# Altium PCB Antenna_v1.PcbDoc
Units mm, origin at the board's own origin, x right, y up, seen from the top; angles counter-clockwise.
Board outline 94.61 x 94.49 mm, 2 copper layers (Top Layer, Bottom Layer); 8 components, 6 nets, 29 pads, 10 vias.
Unrouted connection lines stored in the file: 5.
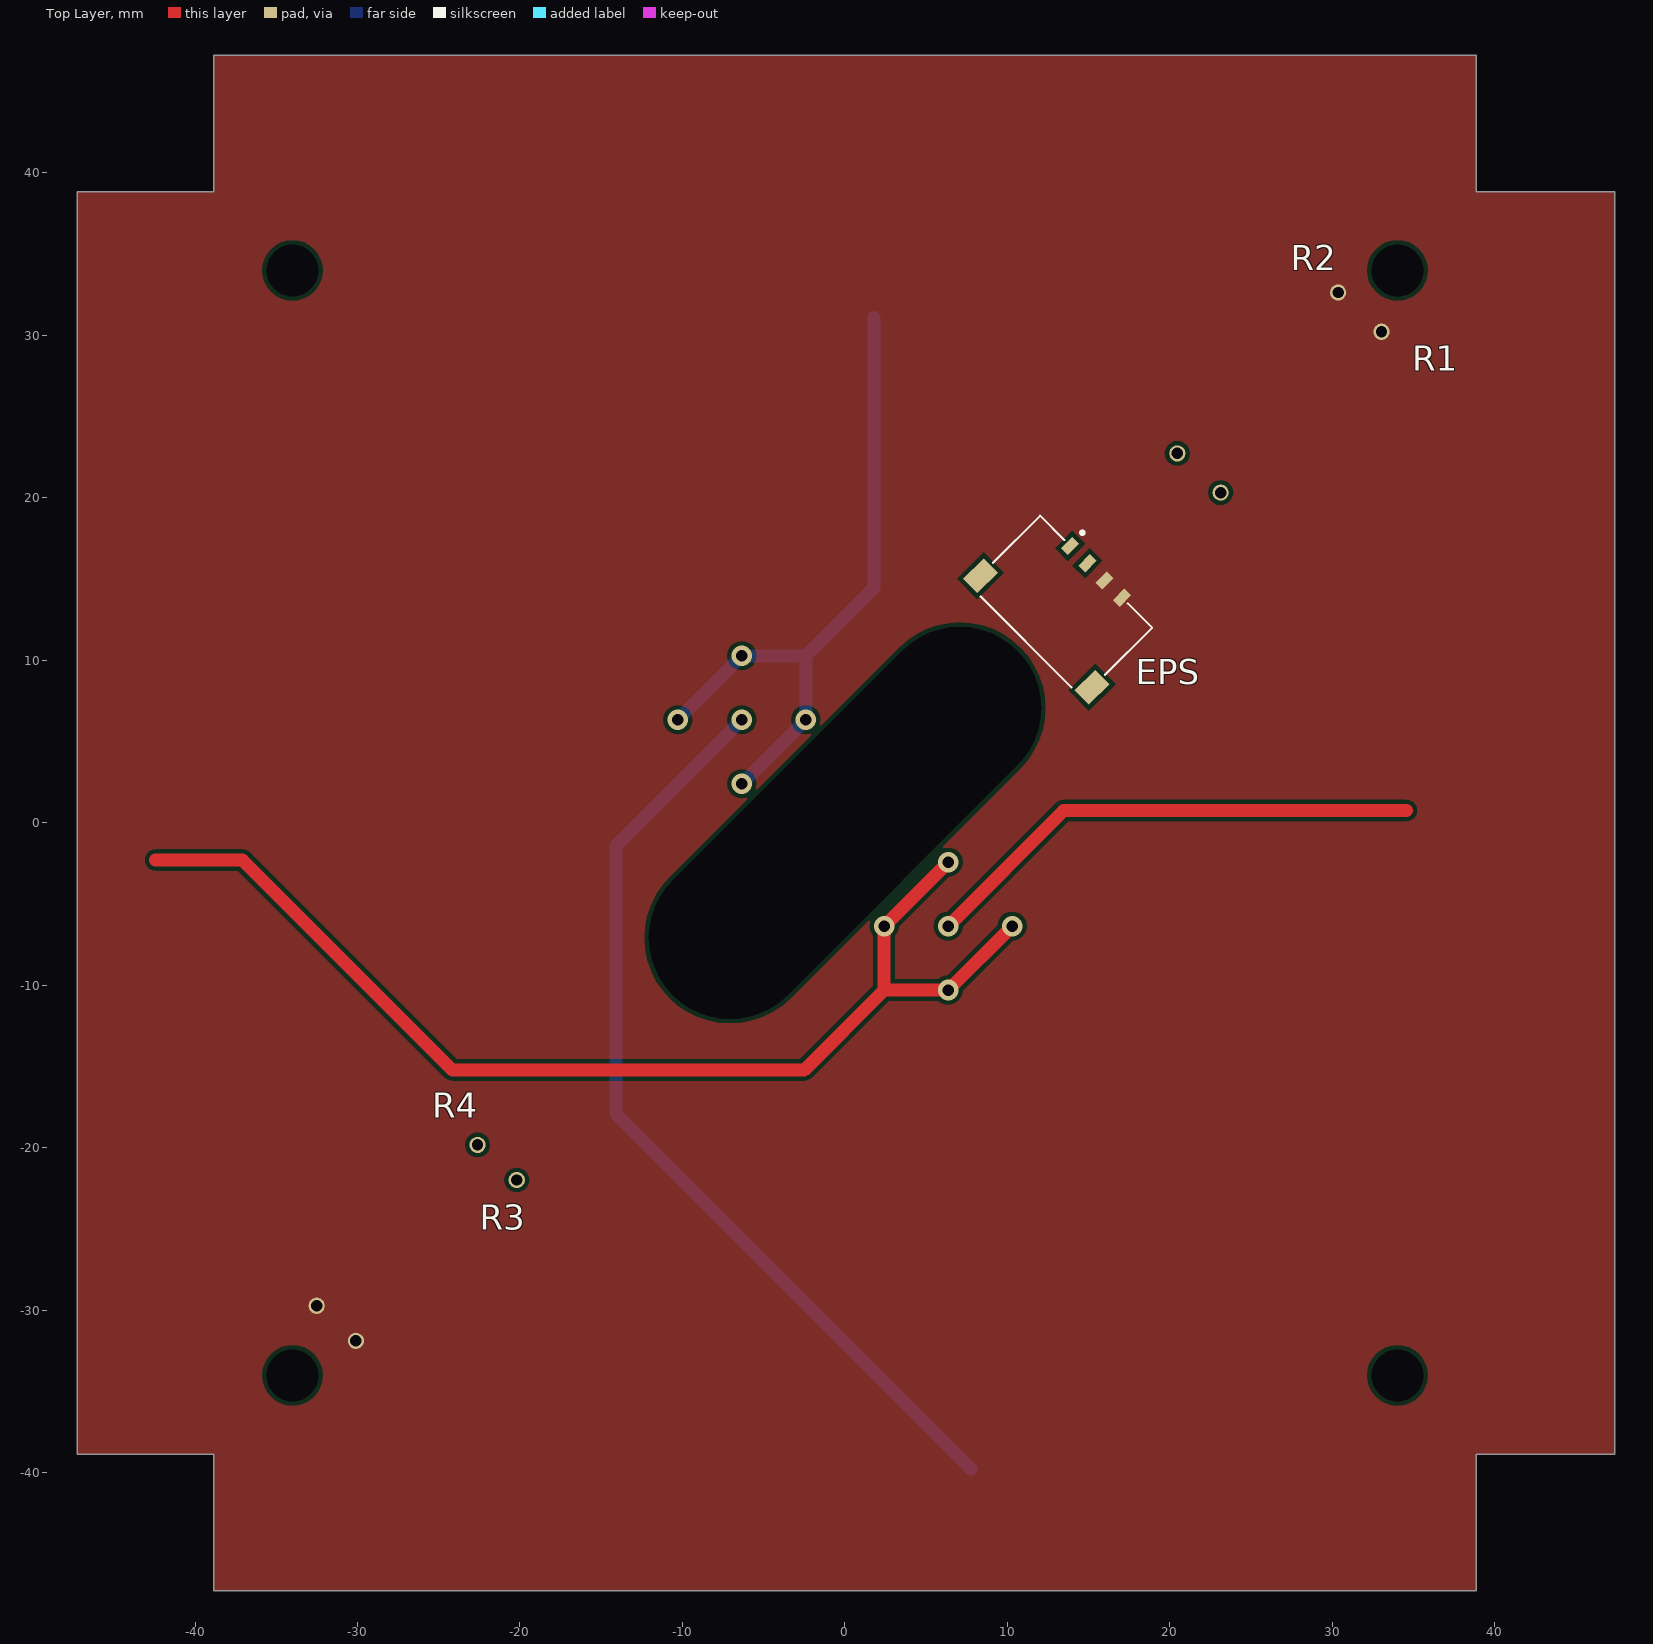
[diagram p0: Top Layer view]
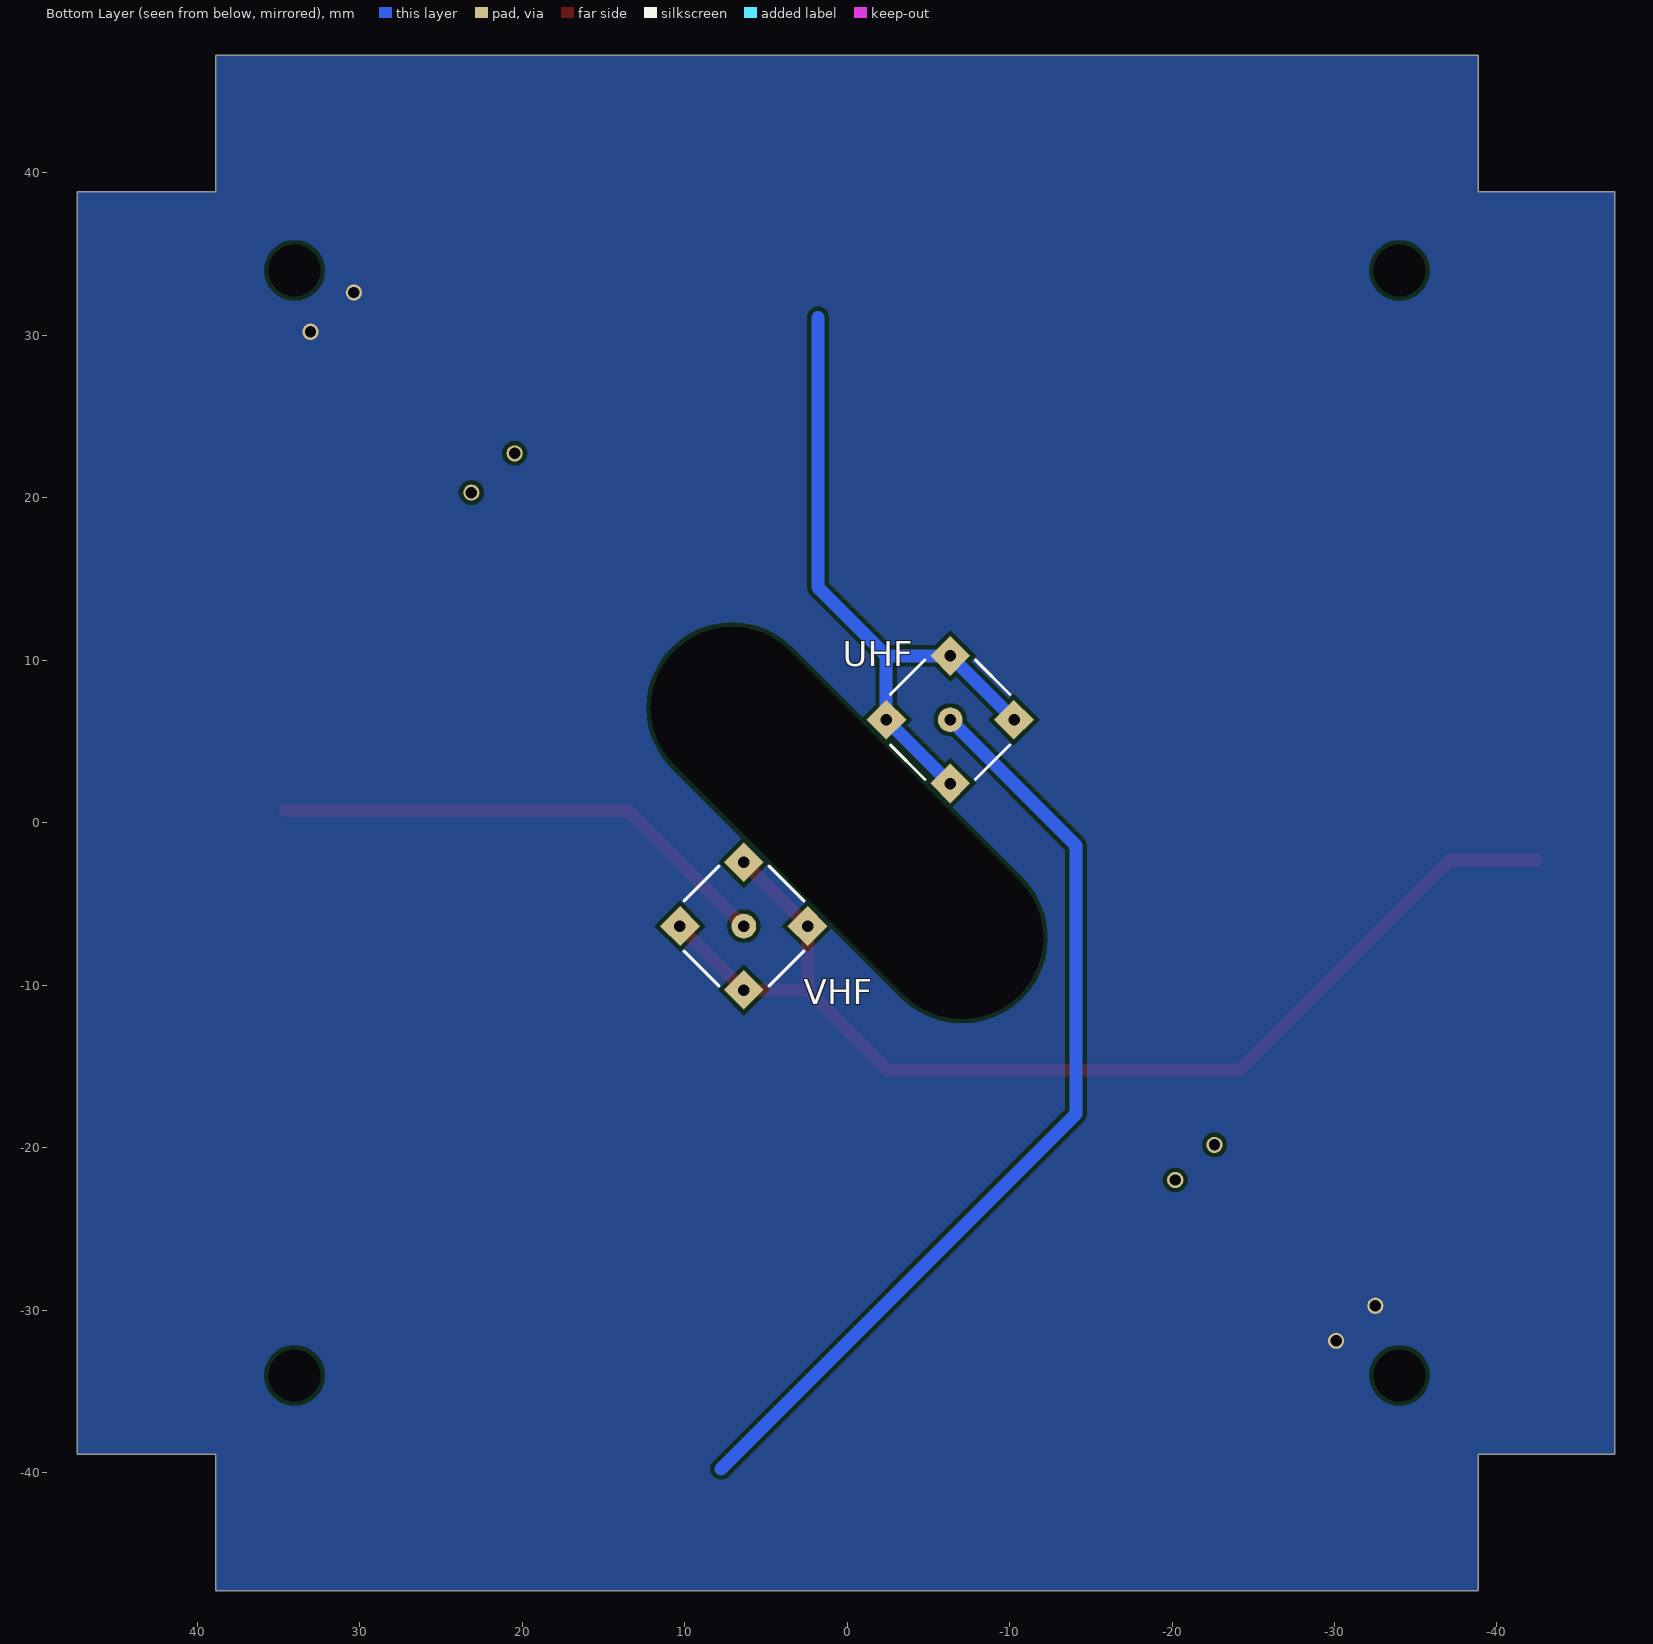
[diagram p1: Bottom Layer view, seen from below]

## Layer stack, top to bottom
Top Solder: solder mask 0.0102, Solder Resist, Dk 3.5
Top Layer: signal copper 0.0356
Dielectric 1: dielectric 0.32, FR-4, Dk 4.8
Bottom Layer: signal copper 0.0356
Bottom Solder: solder mask 0.0102, Solder Resist, Dk 3.5

## Board outline
38.862,47.24 38.862,38.858 47.371,38.858 47.371,-38.866 38.862,-38.866 38.862,-47.248 -38.862,-47.248 -38.862,-38.866 -47.244,-38.866 -47.244,38.858 -38.862,38.858 -38.862,47.24

## Design rules (kind name [scope] priority, off if disabled: settings)
Clearance [All] p1: gap=0.254 ignorepadtopadclearanceinfootprint=FALSE except(0: Arc-Hole Track-Hole SMDPad-Hole THPad-Hole Via-Hole Fill-Hole Poly-Hole Region-Hole Text-Hole)
ComponentClearance [All] p1 off: gap=0.254 collisioncheckmode=3 verticalgap=0.254 showdistances=FALSE
PolygonConnect [All] p1: connectstyle=Direct reliefconductorwidth=0.254 reliefentries=4 polygonreliefangle="90 Angle" airgapwidth=0.254
RoutingVias [All] p1: holewidth=0.711 width=1.27 viastyle="Through Hole" minholewidth=0.711 minwidth=1.27 maxholewidth=0.711 maxwidth=1.27
SolderMaskExpansion [All] p1: expansion=0.102
Width [All] p1: maxlimit=1 minlimit=0.254 preferedwidth=0.254 minimp=50.000000 maximp=50.000000 favimp=50.000000
29 further rules are at their usual default settings.

## Components (designator, comment, footprint, x,y, rotation, side; value= is the part's Value field where it differs from the comment)
EPS "Comment" *MOLEX_5040500491_5040500491(Primary) 13.3,13.3 r315 top
R1 "Comment" "RESITORS 10OHM" 23.121,20.327 r45 top
R2 "Comment" "RESITORS 10OHM" 20.454,22.74 r45 top
R3 "Comment" "RESITORS 10OHM" -30.099,-31.877 r45 top
R4 "Comment" "RESITORS 10OHM" -32.512,-29.718 r45 top
UHF "Comment" CON-SMA-SMD-RA -6.35,6.35 r135 bottom
VHF "Comment" CON-SMA-SMD-RA 6.35,-6.35 r45 bottom
? "Comment" 10OHMRES 1.905,2.028 r0 top

## Footprints (in the part's own frame and the unit in brackets; to place one, negate y for a bottom-side part, rotate by r counter-clockwise, add the part's x,y. Pads: shape width x height; smd on the part's side, far side on the other; paste and mask are expansions set on the pad)
10OHMRES [mm]
*MOLEX_5040500491_5040500491(Primary) [mm]
  rect 0.6x1 smd: 1(-2.25,3.04) 2(-0.75,3.04) 3(0.75,3.04) 4(2.25,3.04)
  rect 1.25x1.8 smd: SH1(4.855,-2.15) SH2(-4.855,-2.15)
  silkscreen extent -4.88,-3.05 4.88,4.25, body extent -5.28,-3.1 5.27,3.34, height 1.98
CON-SMA-SMD-RA [mil] "Connector, SMA Female, 5-Lead, SM, Right-Angle, Body 7x7mm"
  round 60 smd: 1(0,0)
  rect 68.5x68.5 smd: 2(-109.25,109.25) 3(109.25,109.25) 4(109.25,-109.25) 5(-109.25,-109.25)
  silkscreen extent -146,-146 146,146
"RESITORS 10OHM" [mm]
  round 1 hole 0.7: 5(0,0) 6(14,0)

## Free pads (board coordinates)
  round 1.524 hole 10 slot 30 at 45 deg: 4(0,0)
  round 3 hole 3.2: 5(34,34) 6(-34,34) 7(-34,-34) 8(34,-34)

## Via types
v1: diameter 1.27, hole 0.711, Top Layer to Bottom Layer, 10 vias

## Nets (pads, with @x,y where several pads share a name; then routed paths per layer and width w, separated by ;. In a path a pad name is that pad's centre, name@x,y a point inside that pad or via, vN(x,y) a via of type N, cw(c..) or ccw(c..) an arc to the next point about the centre after c; other vN are vias at no path point)
5V_DEP: EPS.1 EPS.2 R1.5 R2.5 R3.6 R4.6
GND: EPS.3 EPS.4 R1.6 R2.6 R3.5 R4.5
UHF_HIGH: UHF.1 | length 58.4
  Bottom Layer w0.8: v1(-6.35,6.35) -14.097,-1.397 -14.097,-17.907 7.747,-39.751
UHF_LOW: UHF.2 UHF.3 UHF.4 UHF.5 | length 41.6
  Bottom Layer w0.8: v1(-10.287,6.35) v1(-6.35,10.287) -2.413,10.287 ; v1(-6.35,2.413) v1(-2.413,6.35) -2.413,10.287 ; 1.778,31.115 1.778,14.478 -2.413,10.287
VHF_HIGH: VHF.1 | length 31.1
  Top Layer w0.8: v1(6.35,-6.35) 13.462,0.762 34.544,0.762
VHF_LOW: VHF.2 VHF.3 VHF.4 VHF.5 | length 71.2
  Top Layer w0.8: -42.418,-2.286 -37.084,-2.286 -24.155,-15.215 -2.515,-15.215 2.413,-10.287 ; v1(6.35,-2.413) v1(2.413,-6.35) 2.413,-10.287 ; v1(10.287,-6.35) v1(6.35,-10.287) 2.413,-10.287
pads on no net: EPS.SH1 EPS.SH2

## Polygon pours and split planes (outlines as drawn)
GND on Top Layer "GND_L01_P000" (solid, pour order 0): 38.862,47.24 38.862,38.858 47.371,38.858 47.371,-38.866 38.862,-38.866 38.862,-47.248 -38.862,-47.248 -38.862,-38.866 -47.244,-38.866 -47.244,38.858 -38.862,38.858 -38.862,47.24
GND on Bottom Layer "Top Layer-No Net" (solid, pour order 1): 38.862,47.24 38.862,38.858 47.371,38.858 47.371,-38.866 38.862,-38.866 38.862,-47.248 -38.862,-47.248 -38.862,-38.866 -47.244,-38.866 -47.244,38.858 -38.862,38.858 -38.862,47.24